# Altium PCB PCB1.PcbDoc
Units mm, origin at the board's own origin, x right, y up, seen from the top; angles counter-clockwise.
Board outline 31.75 x 16.51 mm, 2 copper layers (Top Layer, Bottom Layer); 22 components, 14 nets, 67 pads, 0 vias.
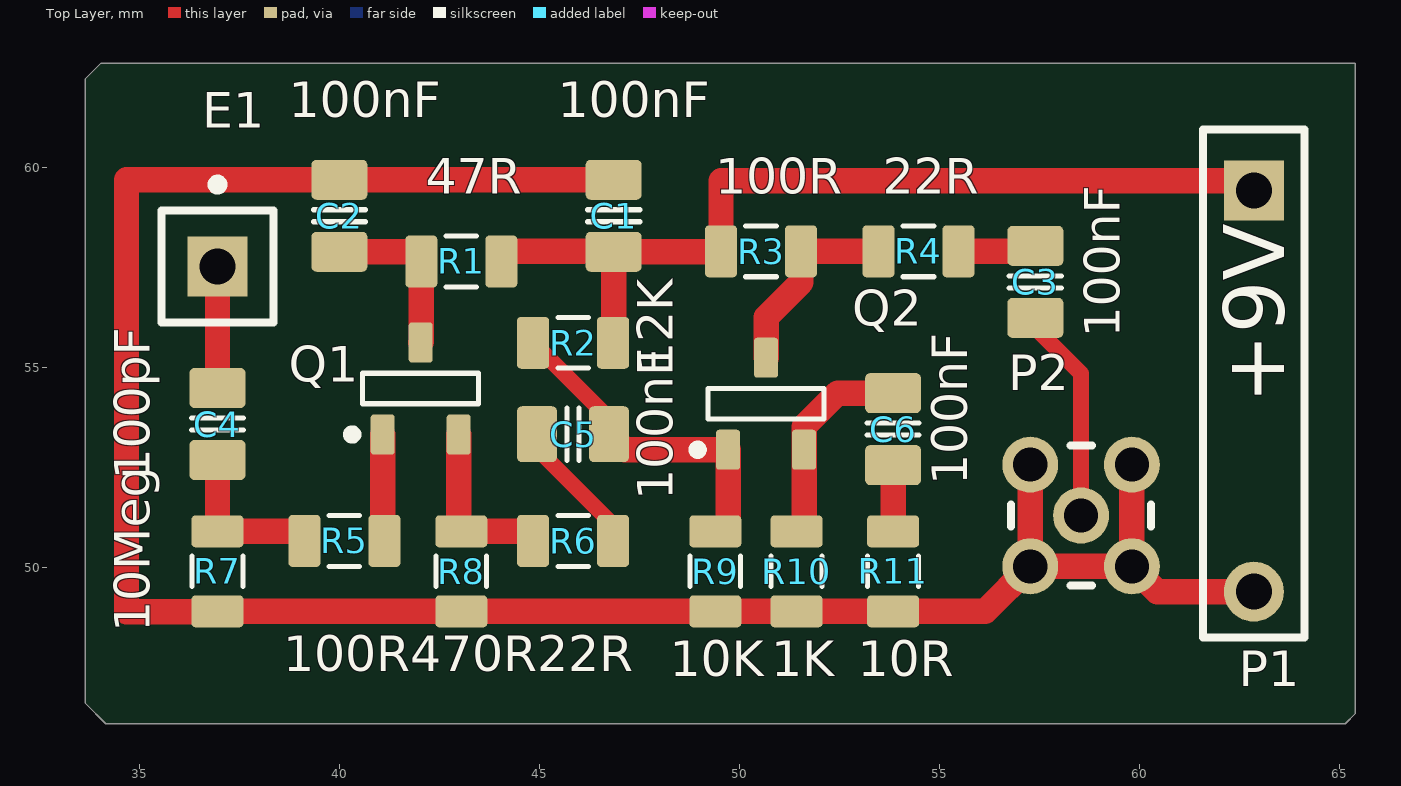
[diagram p0: Top Layer view]
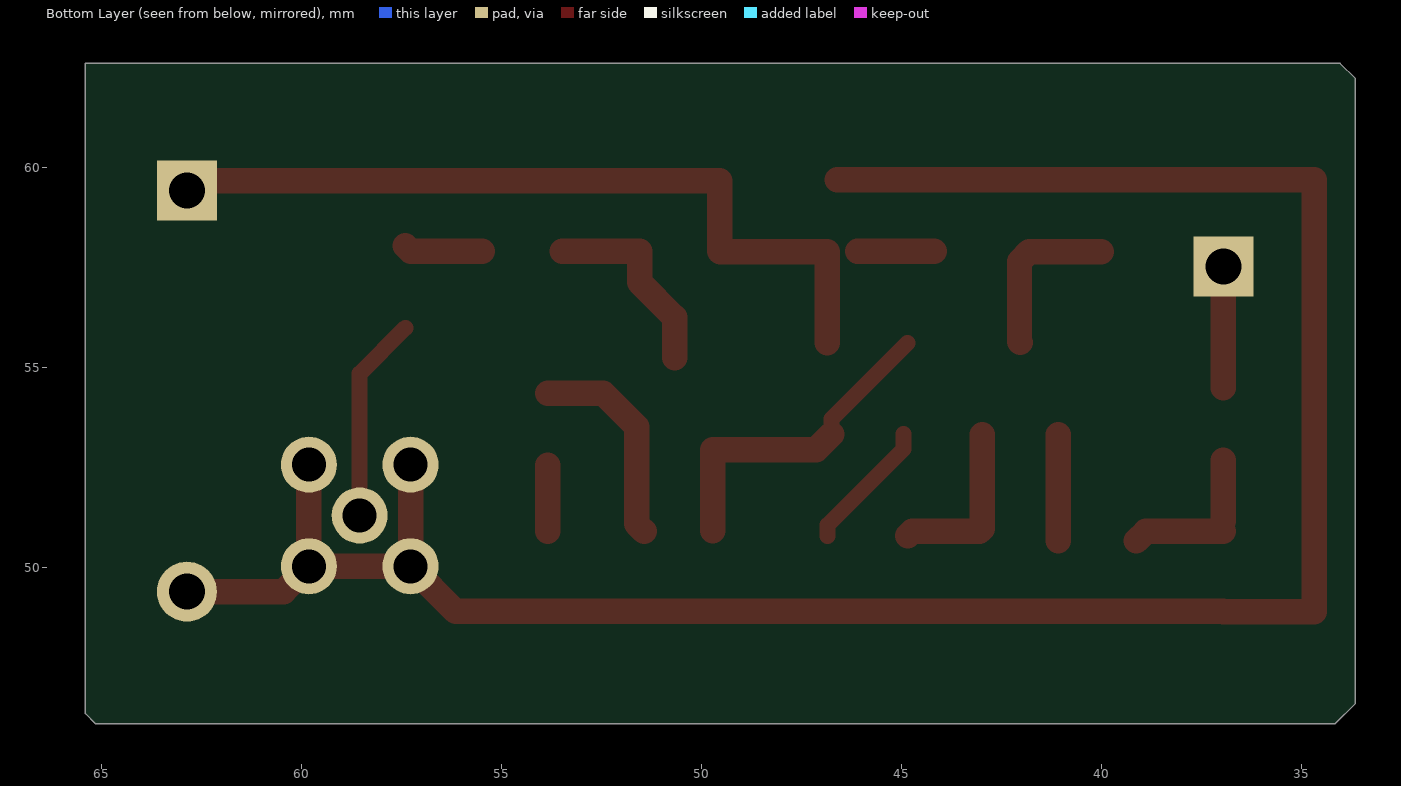
[diagram p1: Bottom Layer view, seen from below]
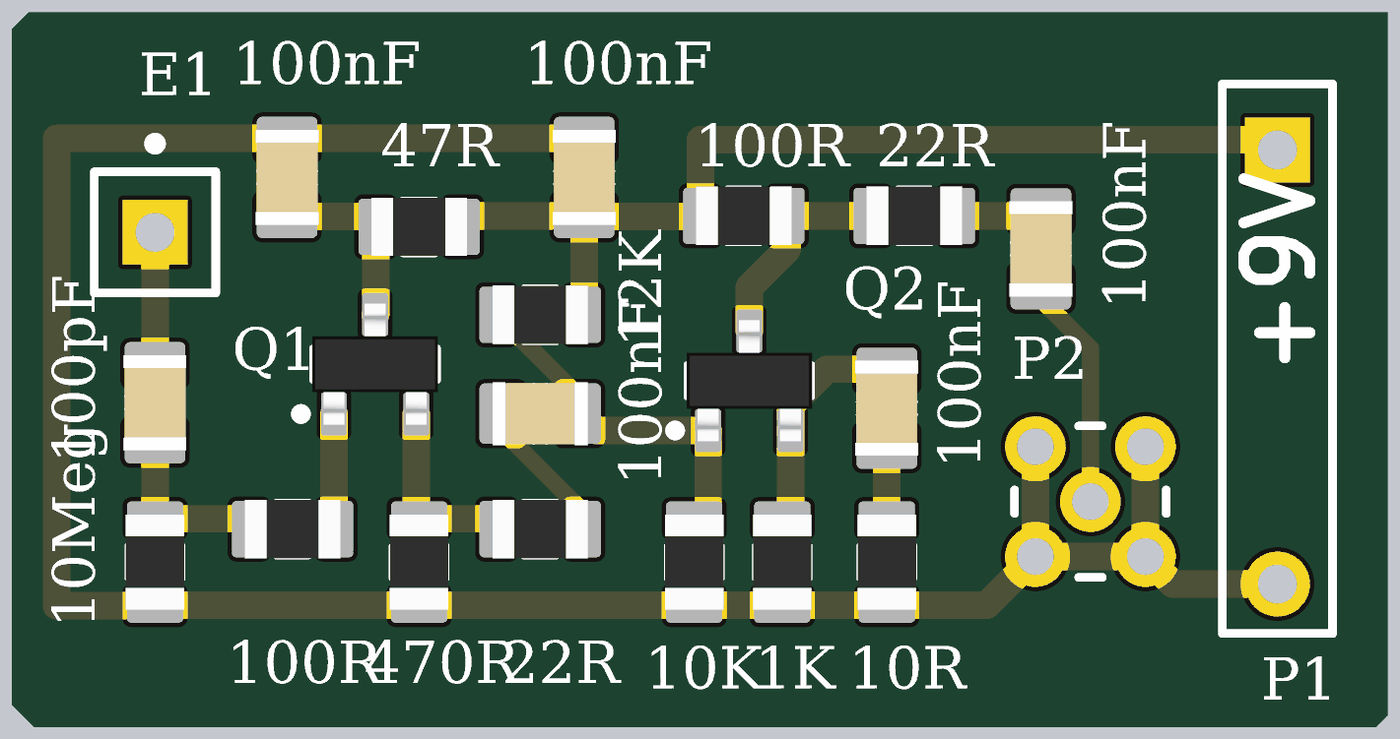
[diagram p2: 3D render of the assembled board from above, using the file's embedded part models]

## Layer stack, top to bottom
Top Solder: solder mask 0.0102, Solder Resist, Dk 3.5
Top Layer: signal copper 0.0356
Dielectric 1: dielectric 0.32, FR-4, Dk 4.8
Bottom Layer: signal copper 0.0356
Bottom Solder: solder mask 0.0102, Solder Resist, Dk 3.5

## Board outline
34.163,46.101 33.655,46.609 33.655,62.23 34.036,62.611 65.405,62.611 65.405,46.355 65.151,46.101

## Design rules (kind name [scope] priority, off if disabled: settings)
Clearance [All] p1: gap=0.254
PolygonConnect [All] p1: connectstyle=Relief reliefconductorwidth=0.254 reliefentries=4 polygonreliefangle="90 Angle" airgapwidth=0.254
RoomDefinition buffer [InComponentClass('buffer')] p1: confinementstyle=ConfineIn formatcopy=TRUE lockcomponents=FALSE outline 34.671,36.957 89.154,36.957 89.154,62.357 34.671,62.357
RoutingVias [All] p1: holewidth=0.711 width=1.27 viastyle="Through Hole" minholewidth=0.711 minwidth=1.27 maxholewidth=0.711 maxwidth=1.27
SolderMaskExpansion [All] p1: expansion=0.102
Width [All] p1: maxlimit=1 minlimit=0.4 preferedwidth=0.5
29 further rules are at their usual default settings.

## Components (designator, comment, footprint, x,y, rotation, side; value= is the part's Value field where it differs from the comment)
C1 "100nF" CAPC2012N 46.863,58.801 r270 top
C2 "100nF" CAPC2012N 40.005,58.801 r270 top
C3 "100nF" CAPC2012N 57.404,57.15 r90 top
C4 "100pF" CAPC2012N 36.957,53.594 r270 top
C5 "100nF" CAPC2012N 45.847,53.34 r180 top
C6 "100nF" CAPC2012N 53.848,53.467 r90 top
E1 "Antenna" PIN1 36.957,57.531 r0 top
P1 "Header 2" HDR1X2 62.865,52.07 r270 top
P2 "COAX-M" MMCX2.54-V5 58.547,51.308 r0 top
Q1 "Value" SOT23-3 42.037,54.483 r90 top
Q2 "Value" SOT23-3 50.673,54.102 r90 top
R1 "47R" RESC2012N 43.053,57.658 r180 top
R2 "12K" RESC2012N 45.847,55.626 r180 top
R3 "100R" RESC2012N 50.546,57.912 r0 top
R4 "22R" RESC2012N 54.483,57.912 r180 top
R5 "100R" RESC2012N 40.132,50.673 r0 top
R6 "22R" RESC2012N 45.847,50.673 r180 top
R7 "10Meg" RESC2012N 36.957,49.911 r270 top
R8 "470R" RESC2012N 43.053,49.911 r270 top
R9 "10K" RESC2012N 49.403,49.911 r270 top
R10 "1K" RESC2012N 51.435,49.911 r270 top
R11 "10R" RESC2012N 53.848,49.911 r270 top

## Footprints (in the part's own frame and the unit in brackets; to place one, negate y for a bottom-side part, rotate by r counter-clockwise, add the part's x,y. Pads: shape width x height; smd on the part's side, far side on the other; paste and mask are expansions set on the pad)
CAPC2012N [mm] "Chip Capacitor, Body 2.0x1.2mm, 0805, IPC Medium Density"
  round 0.254 on Mech14: 0(0,0)
  rrect25% 1x1.4 smd: 1(-0.9,0) 2(0.9,0)
  Top Layer pour cut-out: -0.4,0.8 0.4,0.8 0.4,-0.8 -0.4,-0.8
  silkscreen extent -0.15,-0.65 0.15,0.65, body extent -1.1,-0.72 1.1,0.73, height 1.34
HDR1X2 [mm] "Connector; Header; 2 Position"
  rect 1.5x1.5 hole 0.9: 1(-7.366,0)
  round 1.5 hole 0.9: 2(2.667,0)
  silkscreen extent -8.89,-1.27 3.81,1.27
MMCX2.54-V5 [mm] "Connector; RF Coaxial, MMCX, Thru-Hole; 5 Position; Vertical"
  round 1.4 hole 0.85: 1(0,0) 2(-1.27,-1.27) 3(1.27,-1.27) 4(1.27,1.27) 5(-1.27,1.27)
  silkscreen extent -1.75,-1.75 1.75,1.75
PIN1 [mm] "Generic Antenna; 1 Lead"
  rect 1.5x1.5 hole 0.9: 1(0,0)
  silkscreen extent -1.4,-1.4 1.4,2.17
RESC2012N [mm] "Chip Resistor, Body 2.0x1.2mm, 0805, IPC Medium Density"
  round 0.254 on Mech14: 0(0,0)
  rrect25% 0.8x1.3 smd: 1(-1,0) 2(1,0)
  Top Layer pour cut-out: -0.6,0.75 0.6,0.75 0.6,-0.75 -0.6,-0.75
  silkscreen extent -0.38,-0.64 0.38,0.64, body extent -1.1,-0.67 1.1,0.68, height 0.69
SOT23-3 [mm] "SOT23, 3 pin"
  round 0.5 on Mech14: 0(0,0)
  rrect25% 1x0.6 smd: 1(-1.15,0.95) 2(-1.15,-0.95) 3(1.15,0)
  silkscreen extent -1.25,-1.45 0.38,1.81, body extent -1.4,-1.45 1.4,1.45, height 1.29

## Part data
C1 C2 C3 C4 C5 C6: library part CAPC_27p_0805_50V, "Capacitor SMD Cer 27pF 5% 50V X7R 0805"
E1: "Generic Antenna"
P1: "Header, 2-Pin"
P2: "RF Coaxial PCB Connector, MMCX; Thru-Hole, Vertical Mount Plug,  50 Ohm Impedance"
Q1 Q2: library part NPN_MMBT3904, "Transistor SMD NPN 40V 0.2A 350mW SOT-23"
R1 R2 R3 R4 R5 R6 R7 R8 R9 R10 R11: library part RES_100R_0805_1%, "Resistor SMD chip 100 Ohm 0.125W 1% 0805"

## Nets (pads, with @x,y where several pads share a name; then routed paths per layer and width w, separated by ;. In a path a pad name is that pad's centre, name@x,y a point inside that pad or via, vN(x,y) a via of type N, cw(c..) or ccw(c..) an arc to the next point about the centre after c; other vN are vias at no path point)
GND: C1.1 C2.1 P1.2 P2.2 P2.3 P2.4 P2.5 R7.2 R8.2 R9.2 R10.2 R11.2 | length 56.7
  Top Layer w0.635: C1.1@46.609,59.701 C2.1 34.682,59.701 34.682,48.906 36.952,48.906 R7.2 R8.2 49.276,48.911 R10.2 R11.2 56.15,48.911 P2.2 ; P2.5 57.275,52.576 57.275,50.04 P2.2 ; P2.3 59.819,50.04 59.819,52.576 P2.4 ; P1.2 60.449,49.403 59.815,50.036 57.279,50.036 P2.2
NetC2_2: C2.2 Q1.3 R1.2 | length 4.2
  Top Layer w0.635: C2.2 41.81,57.901 R1.2 42.053,55.649 Q1.3
NetC3_1: C3.1 P2.1 | length 5.2
  Top Layer w0.4: C3.1@57.404,55.996 58.547,54.853 P2.1
NetC3_2: C3.2 R4.1 | length 2
  Top Layer w0.635: R4.1 57.266,57.912 C3.2
NetC4_1: C4.1 E1.1 | length 3
  Top Layer w0.635: C4.1 E1.1
NetC4_2: C4.2 R5.1 R7.1 | length 3.8
  Top Layer w0.635: R7.1 38.894,50.911 R5.1 ; R7.1@36.957,51.165 C4.2
NetC5_1: C5.1 Q2.1 R2.2 R9.1 | length 8.2
  Top Layer w0.4: R2.2 46.747,53.726 C5.1
  Top Layer w0.635: C5.1 47.135,52.952 Q2.1 R9.1@49.723,50.927
NetC5_2: C5.2 R6.1 | length 3.3
  Top Layer w0.4: C5.2 44.947,52.97 46.847,51.07 R6.1@46.847,50.8
NetC6_1: C6.1 R11.1 | length 1.7
  Top Layer w0.635: R11.1 C6.1
NetC6_2: C6.2 Q2.2 R10.1 | length 5.3
  Top Layer w0.635: R10.1 51.623,51.099 Q2.2 51.623,53.528 52.462,54.367 C6.2
NetQ1_1: Q1.1 R5.2 | length 2.7
  Top Layer w0.635: R5.2@41.087,50.673 Q1.1
NetQ1_2: Q1.2 R6.2 R8.1 | length 4.3
  Top Layer w0.635: Q1.2 42.987,50.977 R8.1 44.736,50.911 R6.2@44.847,50.8
NetQ2_3: Q2.3 R3.2 R4.2 | length 5
  Top Layer w0.635: Q2.3 50.673,56.261 51.546,57.134 R3.2 R4.2
VCC: C1.2 P1.1 R1.1 R2.1 R3.1 | length 22.1
  Top Layer w0.635: R1.1@44.18,57.912 46.101,57.912 ; R2.1@46.863,55.626 C1.2 49.535,57.901 R3.1 49.546,59.674 62.627,59.674 P1.1
pads on no net: C1.0 C2.0 C3.0 C4.0 C5.0 C6.0 Q1.0 Q2.0 R1.0 R2.0 R3.0 R4.0 R5.0 R6.0 R7.0 R8.0 R9.0 R10.0 R11.0

## Silkscreen, mask and mechanical layers (free items; w line width, h text height)
Top Overlay:
  text "+9V" at 63.627,54.102 h1.52 r90
Mechanical 1:
  the board outline again, w0.2